# Altium PCB PCB1.PcbDoc
Units mm, origin at the board's own origin, x right, y up, seen from the top; angles counter-clockwise.
Board outline 132.74 x 74 mm, 2 copper layers (Top Layer, Bottom Layer); 105 components, 59 nets, 253 pads, 20 vias.
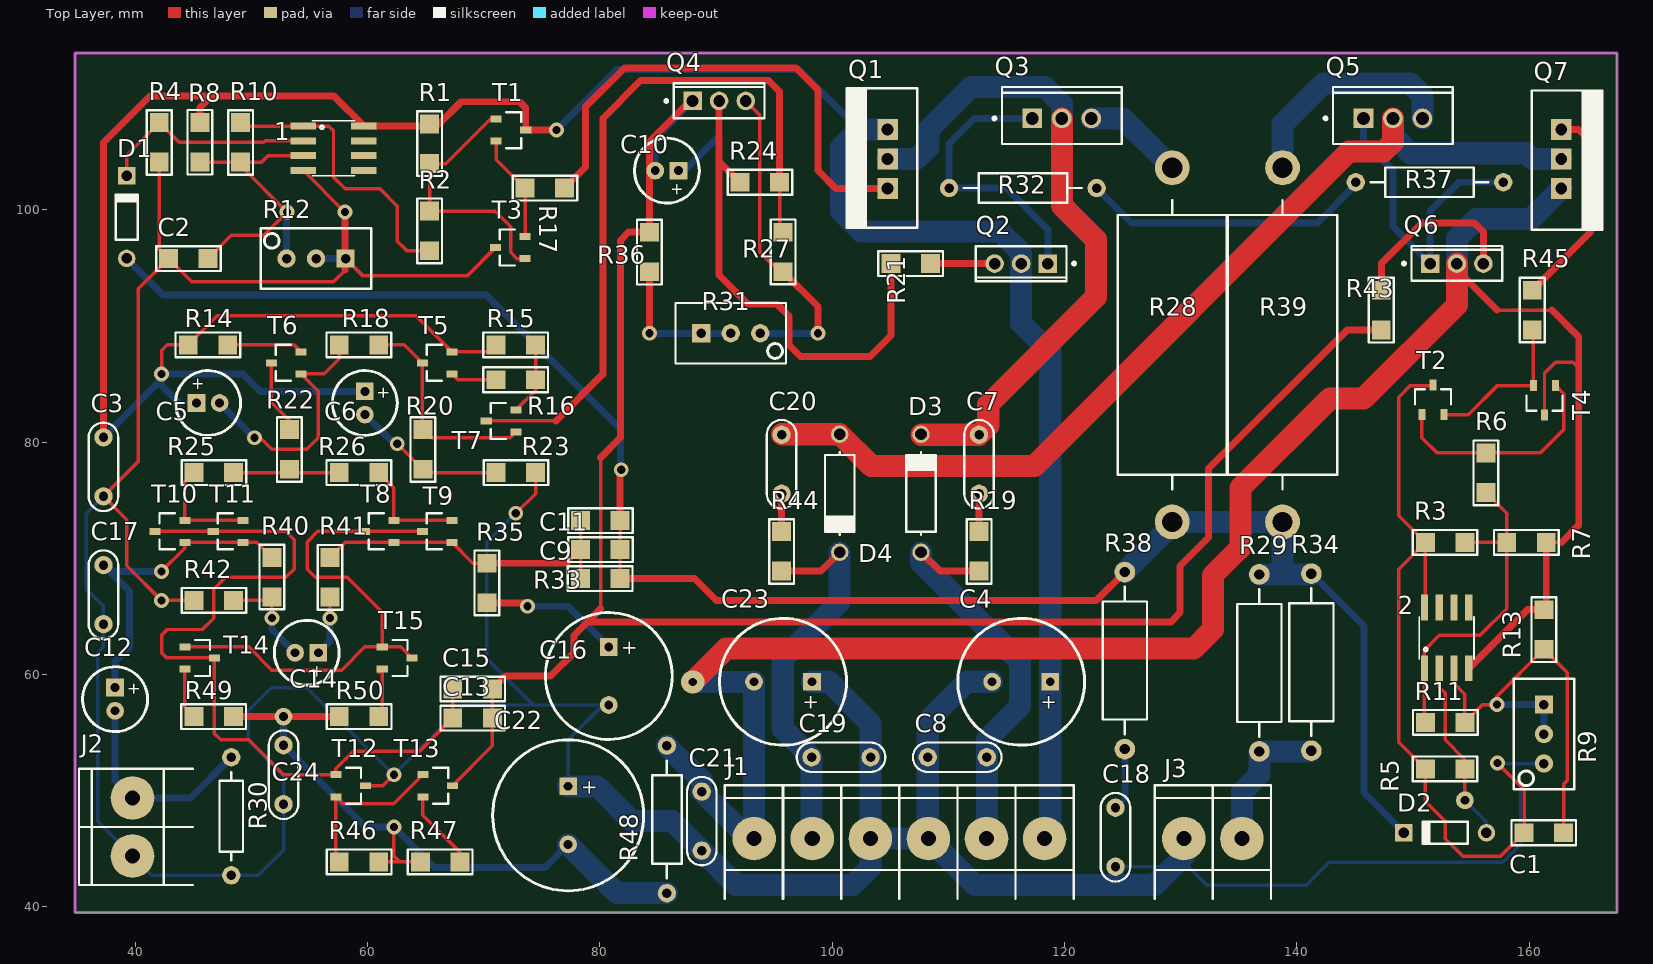
[diagram p0: Top Layer view]
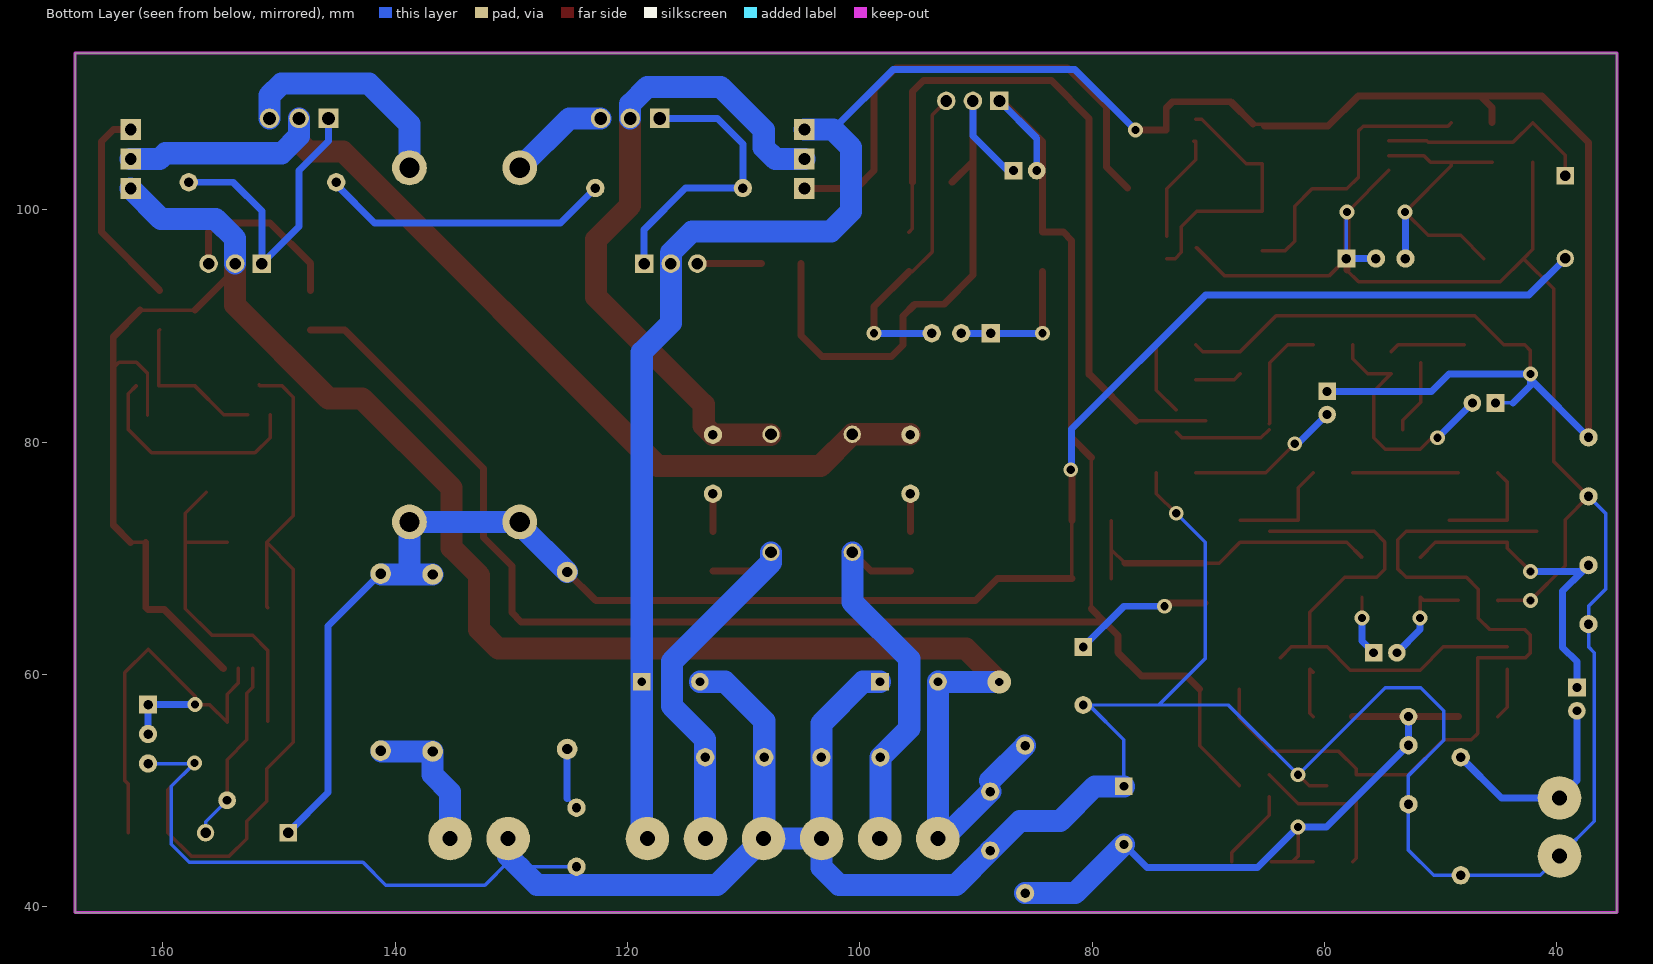
[diagram p1: Bottom Layer view, seen from below]

## Layer stack, top to bottom
Top Layer: signal copper 0.0356
Dielectric: dielectric 0.32, FR-4, Dk 4.8
Bottom Layer: signal copper 0.0356

## Board outline
34.818,39.5 34.818,113.5 167.556,113.5 167.556,39.5

## Design rules (kind name [scope] priority, off if disabled: settings)
Clearance [All] p1: gap=0.5
PolygonConnect [All] p1: connectstyle=Relief reliefconductorwidth=0.254 reliefentries=4 polygonreliefangle="90 Angle"
RoutingVias [All] p1: holewidth=0.711 width=1.27 viastyle="Through Hole" minholewidth=0.711 minwidth=1.27 maxholewidth=0.711 maxwidth=1.27
SilkscreenOverComponentPads [All] p1: minsilkscreentomaskgap=0.254
SolderMaskExpansion [All] p1: expansion=0.102
Width [All] p1: maxlimit=2.5 minlimit=0.3 preferedwidth=1.2
27 further rules are at their usual default settings.

## Components (designator, comment, footprint, x,y, rotation, side; value= is the part's Value field where it differs from the comment)
1 "LM393" SO08 57.068,105.307 r270 top
2 "LM393" SO08 152.89,63.149 r0 top
C1 "100n" 1206 161.267,46.375 r180 top
C2 "100n" 1206 44.568,95.807 r0 top
C3 "100n" CAP200 37.267,77.875 r90 top
C4 "220u" CAP200RP 116.267,59.375 r180 top
C5 "47u" CAP100RP 46.267,83.375 r0 top
C6 "47u" CAP100RP 59.767,83.375 r270 top
C7 "100n" CAP200 112.644,78.101 r270 top
C8 "100n" CAP200 110.767,52.875 r180 top
C9 "100p" 1206 80.041,70.752 r0 top
C10 "47u" CAP100RP 85.767,103.375 r180 top
C11 "100p" 1206 80.041,73.252 r0 top
C12 "47u" CAP100RP 38.267,57.875 r270 top
C13 "100p" 1206 69.041,56.252 r0 top
C14 "47u" CAP100RP 54.767,61.875 r180 top
C15 "100p" 1206 69.041,58.752 r0 top
C16 "1000u" CAP200RP 80.767,59.875 r270 top
C17 "1n" CAP200 37.267,66.875 r270 top
C18 "100n" CAP200 124.385,45.995 r270 top
C19 "100n" CAP200 100.767,52.875 r180 top
C20 "100n" CAP200 95.644,78.101 r270 top
C21 "100n" CAP200 88.767,47.375 r90 top
C22 "1000u" CAP200RP2 77.267,47.875 r270 top
C23 "220u" CAP200RP 95.767,59.375 r180 top
C24 "100n" CAP200 52.767,51.375 r270 top
D1 "Diode 1N4148" DO-35 39.267,99.375 r90 top
D2 "Diode 1N4148" DO-35 152.767,46.375 r180 top
D3 "DIODO SCHOTTKY" DO41 107.644,75.601 r90 top
D4 "DIODO SCHOTTKY" DO41 100.644,75.601 r270 top
J1 "BORNERA 6" BORNERA6 105.767,45.875 r270 top
J2 "IN" BORNERA2 39.767,46.875 r0 top
J3 "Out" BORNERA2 132.767,45.875 r270 top
Q1 "MOSFET P" "TO-220 V" 104.767,104.375 r90 top
Q2 "MJE340" ONSC-TO-225-3-77-09 116.267,95.375 r270 top
Q3 "TIP41C" ONSC-TO-220-3-221A-09 119.767,107.875 r90 top
Q4 "MJE340" ONSC-TO-225-3-77-09 90.267,109.375 r90 top
Q5 "TIP42C" ONSC-TO-220-3-221A-09 148.267,107.875 r90 top
Q6 "MJE350" ONSC-TO-225-3-77-09 153.767,95.375 r90 top
Q7 "MOSFET N" "TO-220 V" 162.767,104.375 r270 top
R1 "22k" 1206 65.342,105.684 r90 top
R2 "22k" 1206 65.342,98.184 r90 top
R3 "22k" 1206 152.767,71.375 r180 top
R4 "10k" 1206 42.068,105.807 r270 top
R5 "10k" 1206 152.767,51.875 r180 top
R6 "10k" 1206 156.267,77.375 r270 top
R7 "22k" 1206 159.767,71.375 r180 top
R8 "10k" 1206 45.568,105.807 r90 top
R9 "10k" "PRESET V" 161.267,54.875 r270 top
R10 "??" 1206 49.068,105.807 r270 top
R11 "??" 1206 152.767,55.875 r0 top
R12 "10k" "PRESET V" 55.568,95.807 r180 top
R13 "10k" 1206 161.267,63.875 r270 top
R14 "100R" 1206 46.267,88.375 r180 top
R15 "68R" 1206 72.767,88.375 r180 top
R16 "2k2" 1206 72.767,85.375 r180 top
R17 "100R" 1206 75.267,101.875 r0 top
R18 "2k2" 1206 59.267,88.375 r180 top
R19 "10" 1206 112.644,70.601 r270 top
R20 "10k" 1206 64.767,79.375 r270 top
R21 "100R" 1206 106.767,95.375 r180 top
R22 "2k2" 1206 53.267,79.375 r270 top
R23 "10k" 1206 72.767,77.375 r0 top
R24 "10R" 1206 93.767,102.375 r0 top
R25 "100R" 1206 46.767,77.375 r0 top
R26 "100R" 1206 59.267,77.375 r180 top
R27 "3k3" 1206 95.767,96.375 r90 top
R28 "0.47" RES1200 129.267,88.375 r90 top
R29 "3uH" RES600 136.767,53.375 r90 top
R30 "100k" RES400 48.267,52.875 r270 top
R31 "5k" "PRESET V" 91.267,89.375 r0 top
R32 "100R" RES500 122.767,101.875 r180 top
R33 "2k2" 1206 80.041,68.252 r180 top
R34 "10" RES600 141.247,53.446 r90 top
R35 "100R" 1206 70.267,67.875 r90 top
R36 "680" 1206 84.267,96.375 r270 top
R37 "100R" RES500 157.767,102.375 r180 top
R38 "10" RES600 125.189,53.583 r90 top
R39 "0.47" RES1200 138.767,88.375 r270 top
R40 "1k1" 1206 51.767,68.375 r90 top
R41 "100" 1206 56.767,68.375 r270 top
R42 "1k1" 1206 46.767,66.375 r0 top
R43 "100R" 1206 147.267,91.375 r270 top
R44 "10" 1206 95.644,70.601 r270 top
R45 "100R" 1206 160.267,91.375 r90 top
R46 "2k2" 1206 59.267,43.875 r0 top
R47 "10" 1206 66.267,43.875 r180 top
R48 "10" RES500 85.767,53.875 r270 top
R49 "68R" 1206 46.767,56.375 r180 top
R50 "68R" 1206 59.267,56.375 r0 top
T1 "TRANSISTOR NPN" SOT23 71.068,107.807 r270 top
T2 "TRANSISTOR NPN" SOT23 150.767,82.375 r0 top
T3 "TRANSISTOR PNP" SOT23 73.568,95.807 r90 top
T4 "TRANSISTOR PNP" SOT23 162.267,84.875 r180 top
T5 "TRANSISTOR PNP" SOT23 67.267,85.875 r90 top
T6 "TRANSISTOR PNP" SOT23 54.267,85.875 r90 top
T7 "TRANSISTOR PNP" SOT23 72.767,80.875 r90 top
T8 "TRANSISTOR PNP" SOT23 62.267,71.375 r90 top
T9 "TRANSISTOR PNP" SOT23 67.267,71.375 r90 top
T10 "TRANSISTOR PNP" SOT23 44.267,71.375 r90 top
T11 "TRANSISTOR PNP" SOT23 49.267,71.375 r90 top
T12 "TRANSISTOR NPN" SOT23 57.267,51.375 r270 top
T13 "TRANSISTOR NPN" SOT23 64.767,51.375 r270 top
T14 "TRANSISTOR NPN" SOT23 44.267,62.375 r270 top
T15 "TRANSISTOR NPN" SOT23 61.267,62.375 r270 top

## Footprints (in the part's own frame and the unit in brackets; to place one, negate y for a bottom-side part, rotate by r counter-clockwise, add the part's x,y. Pads: shape width x height; smd on the part's side, far side on the other; paste and mask are expansions set on the pad)
1206 [mil] "Pasivo 1206"
  rect 64x64 smd: 1(-67,0) 2(67,0)
  silkscreen extent -109,-42 110,42, body extent -63,-32 63,31, height 20
BORNERA2 [mm] "Bornera con Tornillos 5mm separación"
  round 3.75 hole 1.3: 1(0,2.5) 2(0,-2.5)
  silkscreen extent -4.6,-5 5.2,5, body extent -3.76,-4.89 3.94,5.61, height 10
BORNERA6 [mm] "Bornera con Tornillos 5mm separación"
  round 3.75 hole 1.3: 1(0,12.517) 2(0,7.517) 3(0,2.517) 4(0,-2.484) 5(0,-7.484) 6(0,-12.483)
  silkscreen extent -4.6,-15.02 5.2,15.02, body extent -3.76,-14.86 3.94,15.62, height 10.05
CAP100RP [mil] "Body diameter 5mm"
  rect 60x60 hole 30: 1(-39.37,0)
  round 60 hole 30: 2(39.37,0)
  silkscreen extent -110,-110 110,110, body extent -99,-99 99,100, height 454
CAP200 [mil]
  round 62 hole 32: 1(-100,0) 2(100,0)
  silkscreen extent -150,-50 150,50, body extent -110,-46 110,44, height 246
CAP200RP [mil] "Body Diameter 10.33mm"
  rect 60x60 hole 30: 1(-98.43,0)
  round 60 hole 30: 2(98.43,0)
  silkscreen extent -215,-215 215,215, body extent -205,-204 204,205, height 787
CAP200RP2 [mil] "Body Diameter 12.5mm"
  rect 60x60 hole 30: 1(-98.42,0)
  round 60 hole 30: 2(98.43,0)
  silkscreen extent -256,-256 256,256, body extent -246,-245 244,246, height 787
DO41 [mm]
  round 1.5 hole 1.016: 1(-5.08,0) 2(5.08,0)
  silkscreen extent -3.56,-1.27 3.56,1.27, body extent -5.46,-1.19 5.46,1.37, height 2.03
DO-35 [mm] "Diode, Axial; Body 3.8 x 1.9 mm (LxDia. max), Lead Dia. 0.53 mm (max)"
  round 1.5 hole 0.9: 1(-3.55,0)
  rect 1.5x1.5 hole 0.9: 2(3.55,0)
  silkscreen extent -1.95,-0.95 2.05,0.95
ONSC-TO-220-3-221A-09 [mm] "FM, 3-Leads, Body 10.3x4.85mm, Pitch 2.54mm"
  rect 1.7x1.7 hole 1.1: 1(0,2.54)
  round 1.7 hole 1.1: 2(0,0) 3(0,-2.54)
  silkscreen extent -2.2,-5.15 2.69,5.92, body extent -2.18,-5.15 2.67,5.15, height 19.85
ONSC-TO-225-3-77-09 [mm] "FM, 3-Leads, Body 7.8x3mm, Pitch 2.29mm"
  rect 1.6x1.6 hole 1: 1(0,2.29)
  round 1.6 hole 1: 2(0,0) 3(0,-2.29)
  silkscreen extent -1.49,-3.9 1.51,4.68, body extent -1.49,-3.9 1.51,3.9, height 13.64
"PRESET V" [mil]
  rect 62x62 hole 32: 1(-100,0)
  round 62 hole 32: 2(0,0) 3(100,0)
  silkscreen extent -188,-102 187,102, body extent -185,-95 190,95, height 455
RES400 [mil]
  round 62 hole 32: 1(0,0) 2(400,0)
  silkscreen extent 50,-40 350,40, body extent -12,-45 412,46, height 96
RES500 [mil]
  round 62 hole 32: 1(0,0) 2(500,0)
  silkscreen extent 50,-50 450,50, body extent -5,-52 505,54, height 119
RES600 [mil]
  round 70 hole 35: 1(0,0) 2(600,0)
  silkscreen extent 50,-75 550,75, body extent -16,-68 616,70, height 141
RES1200 [mm]
  round 3 hole 1.75: 1(-15.24,0) 2(15.24,0)
  silkscreen extent -12.45,-4.7 12.45,4.7, body extent -15.62,-4.5 15.61,4.5, height 9.51
SO08 [mil]
  rect 24x87 smd: 1(-75,-103) 2(-25,-103) 3(25,-103) 4(75,-103) 5(75,103) 6(25,103) 7(-25,103) 8(-75,103)
  silkscreen extent -93,-71 93,71
SOT23 [mm]
  rect 0.6x0.95 smd: 1(0,0) 2(0.95,2.55) 3(1.9,0)
  silkscreen extent -0.6,0.88 2.5,2.17, body extent -0.53,-0.25 2.47,2.88, height 1
"TO-220 V" [mil]
  rect 70x70 hole 40: 1(-100,0) 2(0,0) 3(100,0)
  silkscreen extent -232,-100 240,139, body extent -197,-79 197,118, height 709

## Part data
1 2: "Comparator Dual DIE"
C1 C2 C3 C7 C8 C9 C11 C13 C15 C17 C18 C19 C20 C21 C24: library part CAP
C4 C5 C6 C10 C12 C14 C16 C22 C23: library part CAPPOL
D1 D2: "High Conductance Fast Diode"
J2 J3: library part "BORNERA 2"
Q2 Q4: "Plastic Medium-Power NPN Silicon Transistor, 3-Pin TO-225, Bulk Box"
Q3 Q5: "Complementary Silicon Plastic Power Transistor, 3-Pin TO-220, Tube"
Q6: "Plastic Medium-Power PNP Silicon Transistor, 3-Pin TO-225, Bulk Box"
R1 R2 R3 R6 R7 R10 R11 R26: library part RES, "RES SMD 1/2W 1206"
R4 R5 R8 R13 R14 R15 R16 R17 R18 R19 R20 R21 R22 R23 R24 R25 R27 R28 R29 R30 R32 R33 R34 R35 R36 R37 R38 R39 R40 R41 R42 R43 R44 R45 R46 R47 R48 R49 R50: library part RES
R9 R12 R31: library part PRESET

## Free pads (board coordinates)
  round 1.524 hole 0.762: 0(52.767,56.375) 0(154.469,49.173)

## Via types
v1: diameter 1.27, hole 0.711, Top Layer to Bottom Layer, 19 vias
v2: diameter 2, hole 0.711, Top Layer to Bottom Layer, 1 vias

## Nets (pads, with @x,y where several pads share a name; then routed paths per layer and width w, separated by ;. In a path a pad name is that pad's centre, name@x,y a point inside that pad or via, vN(x,y) a via of type N, cw(c..) or ccw(c..) an arc to the next point about the centre after c; other vN are vias at no path point)
GND: 1.4 2.8 C1.2 C2.1 C3.1 C4.2 C8.2 C16.2 C17.2 C18.2 C19.1 C21.1 C22.1 C23.1 C24.2 J1.3 J1.4 J2.2 J3.2 R3.2 R4.2 R5.2 R9.3 R12.1 R12.2 R23.2 R30.2 R42.1 T2.2 T3.2 T12.2 | length 438
  Top Layer w0.3: R4.2 42.068,96.605 C2.1 ; R42.1 45.025,66.335 44.985,66.375 v1(42.267,66.375) 39.267,69.375 39.267,73.335 C3.1 40.267,78.335 40.267,93.208 C2.1 ; 1.4 58.047,99.807 v1(58.068,99.807) ; 58.068,94.807 57.068,93.807 44.866,93.807 C2.1 ; R12.1 59.608,94.307 68.568,94.307 T3.2 ; T12.2 61.317,50.425 v1(62.267,51.375) ; v1(72.767,73.875) 74.469,75.577 R23.2 ; 2.8 151.065,65.845 R3.2 ; T2.2 151.667,84.875 149.767,84.875 148.767,83.875 148.767,73.673 R3.2 ; v1(157.267,52.375) 159.565,50.077 C1.2 157.565,44.375 154.267,44.375 152.767,45.875 152.767,47.375 151.065,49.077 R5.2 148.767,54.173 148.767,69.077 R3.2
  Top Layer w0.6: 58.068,94.807 v1(58.068,99.807)
  Bottom Layer w0.3: C3.1 35.767,73.835 35.767,67.375 37.267,65.875 C17.2 37.267,62.375 36.767,61.875 36.767,47.375 J2.2 41.427,42.715 R30.2 50.607,42.715 52.767,44.875 C24.2 52.767,51.303 49.727,54.343 49.727,56.892 51.71,58.875 54.767,58.875 v1(62.267,51.375) 68.267,57.375 74.267,57.375 ; R12.1 v1@58.108,99.807 ; v1(72.767,73.875) 70.267,71.375 70.267,61.375 74.267,57.375 ; C22.1 77.267,54.375 C16.2@80.267,57.375 ; C16.2 C16.2@80.267,57.375 ; J1.3@108.227,45.931 J1.3 ; C18.2 129.187,43.455 129.267,43.375 ; J3.2@130.267,44.375 130.267,43.875 132.267,41.875 140.807,41.875 142.767,43.835 157.727,43.835 159.267,45.375 159.267,50.375 v1@157.307,52.335 ; v1(157.267,52.375) v1@157.307,52.335 ; R9.3 v1@157.307,52.335 ; 74.267,57.375 C16.2@80.267,57.375
  Bottom Layer w0.6: R12.2 R12.1
  Bottom Layer w1.9: C22.1 79.767,50.375 82.767,47.375 86.227,47.375 C21.1 91.727,41.875 101.767,41.875 103.283,43.391 J1.4 J1.3 112.283,41.875 127.767,41.875 129.267,43.375 130.267,44.375 J3.2 ; C23.1 99.725,59.375 103.307,55.793 C19.1 J1.4@103.307,45.898 ; J1.3@108.227,45.931 C8.2 108.227,56.006 111.595,59.375 C4.2
Net1_1: 1.1 R2.1 R10.1 | length 24.9
  Top Layer w0.3: R10.1 49.365,107.212 1.1 56.663,107.212 57.068,106.807 57.068,102.807 58.068,101.807 61.068,101.807 62.568,100.307 62.568,97.307 63.393,96.482 R2.1
Net1_2: 1.2 D1.2 R4.1 | length 18.9
  Top Layer w0.3: D1.2 39.267,104.708 R4.1 43.77,105.807 51.068,105.807 51.203,105.942 1.2
Net1_3: 1.3 C2.2 R8.1 R10.2 R12.3 | length 27.5
  Top Layer w0.3: R8.1 R10.2 ; C2.2 48.27,97.807 51.068,97.807 v1(53.068,99.807) 49.068,103.807 R10.2 ; 1.3 51.433,104.672 50.866,104.105 R10.2
  Bottom Layer w0.6: R12.3 v1@53.028,99.807
Net2_1: 2.1 R3.1 R6.2 R7.2 R11.1 | length 29
  Top Layer w0.3: R11.1@150.985,55.955 2.1 150.985,62.093 152.267,63.375 155.767,63.375 158.065,65.673 R7.2 ; R3.1 R7.2 ; R6.2 158.065,73.875 R7.2
Net2_2: 2.2 D2.1 pad.0@154.469,49.173 R5.1 | length 15.8
  Top Layer w0.3: 2.2 152.255,58.887 152.767,58.375 152.767,54.375 154.469,52.673 R5.1 pad.0@154.469,49.173
  Bottom Layer w0.3: pad.0@154.469,49.173 156.317,47.325 D2.1
Net2_3: 2.3 C1.1 R9.1 R9.2 R11.2 R13.2 | length 38.2
  Top Layer w0.3: 2.3 153.525,59.251 154.469,58.307 R11.2 156.009,57.415 v1(157.227,57.415) 157.227,58.133 R13.2 163.267,60.173 163.267,50.875 162.969,50.577 C1.1
  Bottom Layer w0.6: v1(157.227,57.415) R9.1 R9.2
NetC5_2: C5.2 R18.2 T6.1 | length 21.7
  Top Layer w0.3: v1(50.267,80.375) 50.767,80.375 51.767,79.375 54.767,79.375 55.767,80.375 55.767,84.375 T6.1 56.267,85.875 57.565,87.173 R18.2
  Bottom Layer w0.6: C5.2 v1(50.267,80.375)
NetC6_2: C6.2 R20.2 R23.1 | length 13.4
  Top Layer w0.3: v1(62.565,79.875) R20.2 65.065,77.375 R23.1
  Bottom Layer w0.3: v1@62.267,79.875 v1(62.565,79.875)
  Bottom Layer w0.6: C6.2 v1@62.267,79.875
NetC7_1: C7.1 D3.2 Q1.2 Q3.2 | length 57.9
  Top Layer w0.3: D3.2 D3.2@107.684,80.641
  Top Layer w1.9: D3.2@107.684,80.641 C7.1 113.43,81.428 113.43,83.228 122.693,92.491 122.693,97.456 119.767,100.382 Q3.2
  Bottom Layer w1.9: Q1.2 107.267,104.375 108.267,105.375 108.267,106.875 111.982,110.591 118.266,110.591 119.767,109.09 Q3.2
NetC7_2: C7.2 R19.1 | length 3.3
  Top Layer w0.6: R19.1 C7.2
NetC9_1: C9.1 C11.1 R33.2 R35.2 R41.1 T8.1 T9.1 | length 28.3
  Top Layer w0.3: R41.1 58.065,71.375 T8.1 T9.1 69.065,69.577 R35.2 ; 77.164,69.577 C9.1 ; R33.2 C9.1 ; C11.1 C9.1
  Top Layer w0.6: R35.2 77.164,69.577
NetC10_1: C10.1 Q4.2 R21.2 R24.1 | length 51.4
  Top Layer w0.6: Q4.2 90.267,104.173 ; R24.1 90.267,104.173 ; R21.2 105.065,89.173 103.267,87.375 98.565,87.375 98.267,87.375 97.267,87.375 96.267,88.375 96.267,90.875 95.267,91.875 92.767,91.875 90.267,94.375 90.267,104.173
  Bottom Layer w0.3: C10.1 C10.1@87.267,103.375
  Bottom Layer w0.6: C10.1@87.267,103.375 90.267,106.375 Q4.2
NetC10_2: C10.2 C13.2 C15.2 Q4.1 R36.1 R43.2 T13.2 | length 162.9
  Top Layer w0.3: T13.2 70.743,53.851 C13.2 C15.2 ; 80.072,65.68 80.072,78.695 ; Q4.1@87.767,109.375 Q4.1
  Top Layer w0.6: C15.2 71.866,59.875 75.767,59.875 77.767,61.875 77.767,63.375 78.919,64.528 ; 80.072,65.68 78.919,64.528 ; 80.072,78.695 81.767,80.39 81.767,97.375 82.469,98.077 R36.1 84.267,105.875 Q4.1@87.767,109.375 ; R43.2 144.336,89.673 132.4,77.737 132.4,71.792 129.947,69.339 129.947,65.321 129.153,64.528 78.919,64.528
  Bottom Layer w0.6: C10.2 84.767,106.165 Q4.1
NetC12_1: C12.1 C17.1 R40.2 T10.1 T11.1 | length 27.8
  Top Layer w0.3: v1(42.267,68.875) 44.267,70.875 T10.1 T11.1 50.469,71.375 R40.2
  Bottom Layer w0.3: C17.1 C17.1@37.807,68.875
  Bottom Layer w0.6: C12.1 38.267,61.108 39.498,62.339 39.498,67.183 37.807,68.875 v1(42.267,68.875)
NetC12_2: C12.2 J2.1 R30.1 | length 18.1
  Bottom Layer w0.6: C12.2 38.267,50.875 J2.1 44.767,49.375 R30.1
NetC13_1: C13.1 C15.1 T10.2 T11.2 T12.1 T14.2 | length 69.6
  Top Layer w0.3: T10.2 T11.2 52.952,72.325 53.674,71.603 53.674,69.082 52.967,68.375 47.772,68.375 46.752,67.355 46.752,64.86 45.767,63.875 42.767,63.875 42.267,63.375 42.267,61.875 42.717,61.425 T14.2 46.817,54.925 47.367,54.375 49.767,54.375 52.767,51.375 T12.1 57.267,51.875 58.767,53.375 64.462,53.375 C13.1 C15.1
NetC14_1: C14.1 R41.2 | length 5.2
  Top Layer w0.3: v1(56.767,64.875) R41.2
  Bottom Layer w0.6: C14.1 56.767,62.875 v1(56.767,64.875)
NetC14_2: C14.2 R40.1 R42.2 | length 9
  Top Layer w0.3: R42.2 51.469,66.375 R40.1 v1(51.767,64.875)
  Bottom Layer w0.6: v1(51.767,64.875) 51.767,63.875 C14.2
NetC16_1: C16.1 R35.1 | length 12.1
  Top Layer w0.3: v1@73.469,66.173 v1(73.767,65.875)
  Top Layer w0.6: R35.1 v1@73.469,66.173
  Bottom Layer w0.6: v1(73.767,65.875) 77.267,65.875 C16.1
NetC18_1: C18.1 R38.1 | length 5.4
  Bottom Layer w0.3: C18.1 125.189,49.338
  Bottom Layer w0.6: 125.189,49.338 R38.1
NetC20_1: C20.1 D4.1 Q5.2 Q7.2 | length 84.2
  Top Layer w0.3: C20.1 C20.1@95.684,80.681
  Top Layer w1.9: C20.1@95.684,80.681 D4.1 103.384,77.94 106.891,77.94 113.904,77.94 117.411,77.94 144.476,105.005 147.442,105.005 148.267,105.83 Q5.2
  Bottom Layer w1.9: Q5.2 148.267,106.375 149.767,104.875 159.767,104.875 160.267,104.375 Q7.2
NetC20_2: C20.2 R44.1 | length 3.3
  Top Layer w0.6: R44.1 C20.2
NetC22_2: C22.2 C24.1 pad.0@52.767,56.375 R46.2 R47.2 R48.2 R49.1 R50.1 | length 58.3
  Top Layer w0.3: R46.2 62.767,43.875 ; v1(62.267,46.875) 62.267,44.375 62.767,43.875 ; R47.2 62.767,43.875
  Top Layer w0.6: R49.1 R50.1
  Bottom Layer w0.6: pad.0@52.767,56.375 C24.1 59.807,46.875 v1(62.267,46.875) 65.767,43.375 75.267,43.375 C22.2
  Bottom Layer w1.9: C22.2 81.467,41.175 R48.2
NetJ3_1: J3.1 R29.1 R34.1 | length 12.6
  Bottom Layer w0.3: R34.1@141.176,53.375 R34.1
  Bottom Layer w1.9: J3.1 135.267,49.875 136.767,51.375 R29.1 R34.1@141.176,53.375
NetQ1_1: Q1.1 R17.2 | length 43.5
  Top Layer w0.6: R17.2 78.767,103.673 78.767,108.875 82.11,112.218 96.882,112.218 98.767,110.333 98.767,103.375 100.307,101.835 Q1.1
NetQ2_1: Q2.1 Q3.1 R32.2 | length 25.2
  Bottom Layer w0.3: R32.2 R32.2@110.227,102.035 ; Q3.1@117.067,107.715 Q3.1
  Bottom Layer w0.6: Q3.1 112.267,107.875 110.067,105.675 R32.2 114.991,101.875 118.557,98.309 Q2.1
NetQ2_3: Q2.3 R21.1 | length 5.5
  Top Layer w0.6: R21.1 Q2.3
NetQ3_3: Q3.3 R28.2 | length 8.7
  Bottom Layer w1.9: Q3.3 125.007,107.875 R28.2
NetQ4_3: Q4.3 R27.1 R31.3 | length 27.7
  Top Layer w0.3: Q4.3 93.767,108.165 93.767,96.375 95.469,94.673 R27.1
  Top Layer w0.6: R27.1 98.767,91.673 v1(98.767,89.375)
  Bottom Layer w0.6: R31.3 v1(98.767,89.375)
NetQ5_1: Q5.1 Q6.1 R37.1 | length 26.8
  Bottom Layer w0.3: Q5.1@145.227,107.875 Q5.1@145.267,107.835
  Bottom Layer w0.6: Q5.1 145.727,105.915 148.267,103.375 148.267,98.585 Q6.1 151.477,99.888 153.964,102.375 R37.1
NetQ5_3: Q5.3 R39.1 | length 19.6
  Bottom Layer w1.9: R39.1 138.767,107.375 142.267,110.875 149.767,110.875 150.807,109.835 Q5.3
NetQ6_3: Q6.3 R43.1 | length 15.9
  Top Layer w0.3: Q6.3 Q6.3@156.267,95.165
  Top Layer w0.6: R43.1 147.267,95.375 150.767,98.875 155.267,98.875 156.057,98.085 Q6.3
NetQ7_1: Q7.1 R45.2 | length 17.8
  Top Layer w0.6: R45.2 165.267,98.077 165.267,105.875 164.227,106.915 Q7.1
NetR1_1: R1.1 R2.2 T1.1 T3.1 | length 22.6
  Top Layer w0.3: T1.1 70.568,107.807 66.743,103.982 R1.1 R2.2 70.989,99.886 72.318,98.557 72.318,96.344 72.855,95.807 T3.1
NetR6_1: R6.1 T2.1 T4.1 | length 19.7
  Top Layer w0.3: T2.1 150.767,80.375 152.065,79.077 R6.1 160.969,79.077 162.982,81.09 162.982,84.16 T4.1
NetR14_1: R14.1 T6.3 | length 6.5
  Top Layer w0.3: R14.1 53.667,88.375 T6.3
NetR15_1: R15.1 R16.1 T7.3 | length 6.3
  Top Layer w0.3: T7.3 74.469,84.477 R16.1 R15.1
NetR16_2: R16.2 T5.1 | length 4
  Top Layer w0.3: T5.1 67.767,85.375 R16.2
NetR18_1: R18.1 R20.1 T5.2 T7.1 | length 18.2
  Top Layer w0.3: R18.1 63.167,88.375 T5.2 64.717,81.627 R20.1@64.767,81.577 ; R20.1 65.469,80.375 72.267,80.375 T7.1
NetR22_1: R22.1 T6.2 | length 6.4
  Top Layer w0.3: T6.2 51.717,83.425 53.267,81.875 R22.1
NetR22_2: R22.2 R25.2 R26.2 | length 9.1
  Top Layer w0.3: R25.2 R26.2
NetR24_2: R24.2 R27.2 T7.2 | length 62.9
  Top Layer w0.3: T7.2 76.217,81.825 ; R24.2 95.469,98.375 R27.2
  Top Layer w0.6: 76.217,81.825 80.242,85.85 ; 80.267,85.825 80.267,107.875 83.51,111.118 94.524,111.118 95.469,110.173 R24.2
NetR25_1: R25.1 T10.3 T11.3 | length 9.4
  Top Layer w0.3: R25.1 44.267,76.577 T10.3 T11.3
NetR26_1: R26.1 T8.3 T9.3 | length 9.6
  Top Layer w0.3: R26.1 62.267,76.077 T8.3 T9.3
NetR31_1: R31.1 R31.2 R36.2 | length 12.3
  Top Layer w0.6: v1(84.267,89.375) R36.2
  Bottom Layer w0.6: v1(84.267,89.375) R31.1 R31.2
NetR32_1: R32.1 R37.2 | length 25.1
  Bottom Layer w0.3: R37.2@145.067,102.175 R37.2
  Bottom Layer w0.6: R32.1 125.767,98.875 141.767,98.875 R37.2@145.067,102.175
NetR46_1: R46.1 T12.3 T13.1 | length 14.5
  Top Layer w0.3: R46.1 57.267,44.173 T12.3 57.867,48.875 62.267,48.875 T13.1
NetR47_1: R47.1 T13.3 | length 6.9
  Top Layer w0.3: T13.3 64.767,47.875 67.969,44.673 R47.1
NetR49_2: R49.2 T14.3 | length 4.4
  Top Layer w0.3: T14.3 44.267,57.173 R49.2
NetR50_2: R50.2 T15.3 | length 4.6
  Top Layer w0.3: R50.2 61.267,56.673 T15.3 T15.3@60.969,60.177
NetT8_2: T8.2 T9.2 T14.1 T15.1 T15.2 | length 45.2
  Top Layer w0.3: T14.1 49.767,62.375 51.767,60.375 57.767,60.375 59.767,62.375 T15.1 ; T15.2 62.867,62.375 T15.1 ; T9.2 T8.2 55.717,72.325 54.796,71.404 54.796,69.071 55.492,68.375 58.267,68.375 61.267,65.375 T15.1
OUT1: C9.2 C11.2 D1.1 D2.2 R28.1 R29.2 R33.1 R34.2 R38.2 R39.2 | length 157.2
  Top Layer w0.3: R33.1 C9.2 C11.2 ; v1@81.743,77.528 v1(81.844,77.629)
  Top Layer w0.6: R33.1 88.147,68.252 90.037,66.362 122.728,66.362 R38.2 ; C11.2 v1@81.743,77.528
  Bottom Layer w0.3: R28.1@129.267,72.901 R28.1 ; 138.767,68.82 138.972,68.615 ; R34.2@141.176,68.615 R34.2
  Bottom Layer w0.6: D1.1 42.411,92.681 70.22,92.681 81.767,81.134 v1@81.767,77.375 ; R34.2 145.767,64.167 145.767,49.825 D2.2
  Bottom Layer w1.9: R38.2 R28.1@129.267,72.901 ; R28.1 R39.2 138.767,68.82 ; R29.2 138.972,68.615 R34.2@141.176,68.615
SW+: R17.1 T1.3 T3.3 | length 9.4
  Top Layer w0.3: T1.3@71.234,105.907 T1.3 71.068,104.307 73.568,101.807 T3.3
SW-: R45.1 T2.3 T4.3 | length 13.6
  Top Layer w0.3: T2.3 154.767,82.375 157.267,84.875 T4.3 160.367,89.573 R45.1
V+: C8.1 D3.1 J1.2 R19.2 | length 35
  Top Layer w0.6: D3.1 109.266,68.899 R19.2
  Bottom Layer w1.9: D3.1 107.644,69.636 116.167,61.113 116.167,57.275 113.307,54.415 C8.1 J1.2@113.307,45.898
V++: 1.8 C3.2 C4.1 C5.1 C6.1 J1.1 Q1.3 Q2.2 R1.2 R8.2 R14.2 R15.2 T1.2 T5.3 | length 245.9
  Top Layer w0.3: v1(42.267,85.875) 42.267,87.875 42.767,88.375 R14.2 47.065,90.875 64.167,90.875 T5.3 70.465,87.775 R15.2 ; R1.2@65.168,107.212 R1.2 R1.2@66.147,107.386
  Top Layer w0.6: C3.2 37.267,105.807 41.267,109.807 46.568,109.807 ; R8.2 45.568,108.807 46.568,109.807 ; R1.2@65.168,107.212 1.8 57.089,109.807 46.568,109.807 ; R1.2@66.147,107.386 68.068,109.307 73.068,109.307 73.618,108.757 T1.2 v1@76.249,106.857
  Bottom Layer w0.3: C3.2@36.767,80.415 C3.2 ; v1@42.267,85.415 v1(42.267,85.875) ; 43.767,83.375 C5.1 ; J1.1@118.267,45.891 J1.1 J1.1@118.767,46.358
  Bottom Layer w0.6: C3.2 42.267,85.415 42.267,84.875 43.767,83.375 ; v1(42.267,85.875) 49.267,85.875 50.767,84.375 C6.1 ; v1(76.267,106.875) 81.492,112.1 97.121,112.1 102.307,106.915
  Bottom Layer w1.9: Q1.3 102.307,106.915 100.767,105.375 100.767,99.87 102.486,98.151 114.421,98.151 116.267,96.305 Q2.2 116.267,90.243 118.767,87.743 C4.1 J1.1@118.767,46.358
V-: C19.2 D4.2 J1.5 R44.2 | length 33.3
  Top Layer w0.6: R44.2 99.022,68.899 D4.2
  Bottom Layer w1.9: J1.5@98.227,45.931 C19.2 95.743,55.359 95.743,61.351 100.644,66.252 D4.2
V--: 2.4 C21.2 C23.2 J1.6 Q6.2 Q7.3 R7.1 R13.1 R48.1 T4.2 | length 185.8
  Top Layer w0.3: 157.227,91.375 161.954,91.375 ; R13.1 R13.1@161.469,65.779 ; T4.2 161.317,85.925 162.267,86.875 163.767,86.875 164.267,86.375 ; R7.1 162.767,71.375
  Top Layer w0.6: Q6.2@153.767,94.835 157.227,91.375 ; 2.4 159.839,65.577 R13.1 ; R13.1@161.469,65.779 R7.1 ; 161.954,91.375 164.267,89.062 164.267,86.375 164.267,72.875 162.767,71.375
  Top Layer w1.9: v2(87.985,59.349) 90.859,62.223 131.115,62.223 132.767,63.875 132.767,68.537 135.136,70.907 135.136,76.055 142.849,83.768 145.741,83.768 153.767,91.793 Q6.2
  Bottom Layer w0.3: C21.2 88.767,50.875 ; J1.6@92.807,45.875 J1.6 J1.6@93.267,45.891 ; C23.2@93.241,59.349 C23.2
  Bottom Layer w1.9: R48.1 88.767,50.875 ; v2(87.985,59.349) C23.2@93.241,59.349 ; C21.2 J1.6@92.807,45.875 ; J1.6@93.267,45.891 C23.2 ; Q6.2 153.767,97.536 155.453,99.223 160.154,99.223 Q7.3
pads on no net: 1.5 1.6 1.7 2.5 2.6 2.7

## Keep-outs
Keep-Out Layer:
  the board outline again, w0.254

## Text inside footprints (layer, text, board x,y; h text height)
C4: Top Overlay "+" at 119.391,58.13 h1.27 r180
C5: Top Overlay "+" at 44.819,84.543 h1.02
C6: Top Overlay "+" at 60.935,84.823 h1.02 r270
C10: Top Overlay "+" at 87.215,102.207 h1.02 r180
C12: Top Overlay "+" at 39.435,59.323 h1.02 r270
C14: Top Overlay "+" at 56.215,60.707 h1.02 r180
C16: Top Overlay "+" at 82.011,62.999 h1.27 r270
C22: Top Overlay "+" at 78.588,50.974 h1.27 r270
C23: Top Overlay "+" at 98.891,58.13 h1.27 r180